# Altium PCB ALTAIR_PD_Sergeant_V26.3b.PcbDoc (part 2 of 4)
Units mm, origin at the board's own origin, x right, y up, seen from the top; angles counter-clockwise.
Board outline 74 x 56 mm, 4 copper layers (Top Layer, Layer 1, Layer 2, Bottom Layer), stack 1.675 mm thick; 215 components, 142 nets, 676 pads, 469 vias.
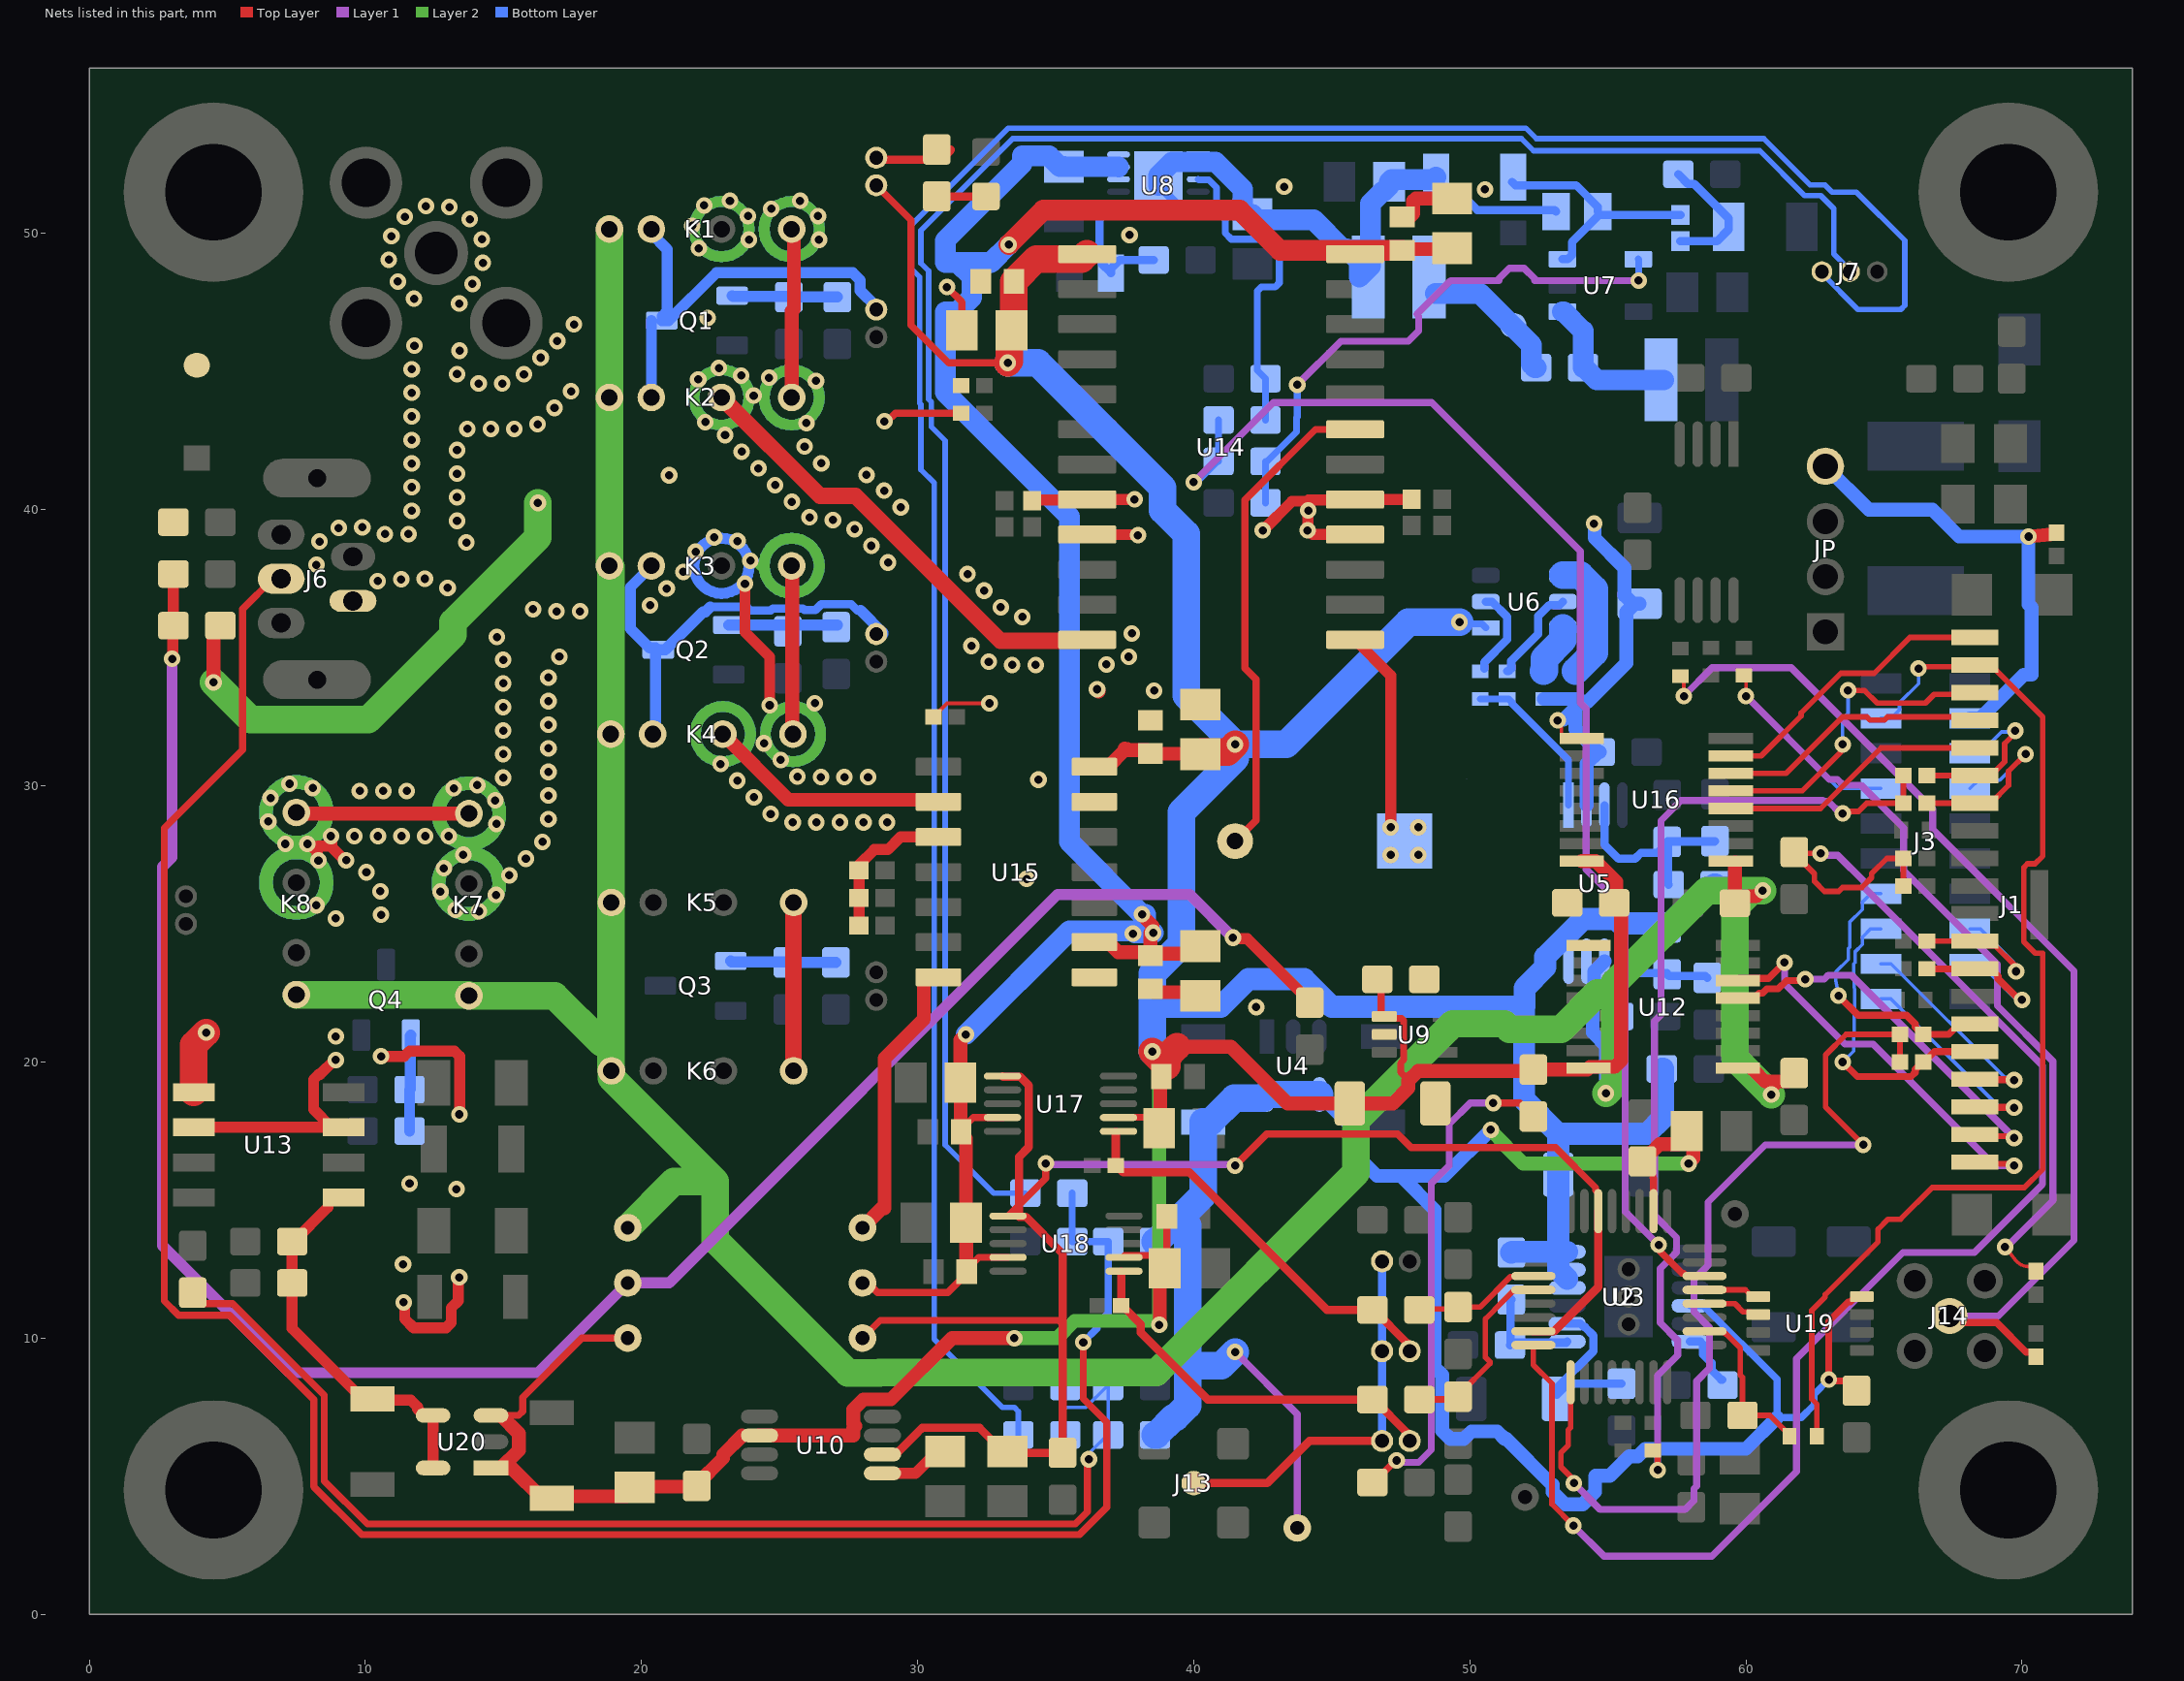
[diagram p4: the nets of this part, all layers, seen from the top]

## Part data
C00 C0: library part CAP, "Murata GRT188R61H105KE13D - Cap Ceramic 1uF 10% 50V X5R 0603 (Placeholder)", MF=Murata, MP=GRT188R61H105KE13D
C1 C2 C3 C4 C12 C23: library part CAP, "Murata GRT319R6YA106KE01D - Cap Ceramic 10uF 35V X5R 10% Pad SMD 1206 85C Automotive T/R", MF=Murata, MP=GRT319R6YA106KE01D
C5 C10 C11 C13 C22 C24 C26 C27 C29 C32 C33 C35 C37 C39 C41 C42 C43 C45 C47 C49 C51 C53 C56 C57 C60: library part CAP, "Kemet C0603C104K5RACAUTO - Cap Ceramic 0.1uF 50V X7R 10% 0603 125C Paper T/R", MF=Kemet, MP=C0603C104K5RACAUTO
C6 C7 C8 C14 C18 C19 C20 C34 C36 C38 C40 C44 C46 C48 C50 C52 C54: library part CAP, "Murata GRM21BR61E106KA73L - Cap Ceramic 10uF 10% 25V X5R 0805", MF=Murata, MP=GRM21BR61E106KA73L
C9 C15 C17 C28: library part CAP, "Murata GRT188R61H105KE13D - Cap MLCC AEC-Q200 X5R 1uF 50V 0603", MF=Murata, MP=GRT188R61H105KE13D
C16: library part CAP, "Kemet C1206C331J5GACTU - Cap Ceramic 330pF 50V 5% NP0 1206", MF=Kemet, MP=C1206C331J5GACTU
C21: library part CAP, "Kemet C0805C475K8PACTU - Cap Ceramic 4.7uF 10V X5R 0805", MF=Kemet, MP=C0805C475K8PACTU
C30: library part CAP, "Wurth Elektronik 885012008037 - Cap Ceramic 10pF 5% 50V NP0 1206", MF="Wurth Elektronik", MP=885012008037
C31: library part CAP, "Kemet C1206C301K5GACTU - Cap Ceramic 300pF 10% 50V NP0 1206", MF=Kemet, MP=C1206C301K5GACTU
C58 C59 C61 C62 C63 C64 C65 C66: library part CAP, "Cap, Nonpolar, Any, Must choose footprint manually"
D1: library part Schottky, "DIODE SCHOTTKY 20V 500MA SOD123", Average Rectified Current=500mA, Case/Package=SOD-123-2, Forward Voltage=385mV, Max Forward Surge Current (Ifsm)=5.5A, Max Operating Temperature=125°C, Max Repetitive Reverse Voltage (Vrrm)=20V, Max Reverse Leakage Current=250uA, Min Operating Temperature=-65°C, Package Quantity=3000, Contact Plating=Tin, Current Rating=500mA, Element Configuration=Single, Forward Current=500mA, Height=1.12mm, Lead Free="Lead Free", Length=2.69mm, Max Reverse Voltage (DC)=20V, Max Surge Current=5.5A, MF=onsemi, MP=MBR0520LT1G, Number of Pins=2, Output Current=500mA, Packaging="Tape and Reel", Peak Non-Repetitive Surge Current=5.5A, Peak Reverse Current=250uA, Polarity=Standard, Radiation Hardening=No, REACH SVHC="No SVHC", Termination=SMD/SMT, Voltage Rating (DC)=20V, Width=1.6mm
D2: library part LED-blue, "LED BLUE CLEAR 0603 SMD", Case Code (Imperial)=0603, Case Code (Metric)=1608, Color=Blue, Forward Current=30mA, Forward Voltage=3.2V, Max Operating Temperature=85°C, Min Operating Temperature=-40°C, Package Quantity=4000, Supplier Part Number 1=732-4966-1-ND, Test Current=20mA, Case/Package=0603, Category=LEDs, ComponentLink1Description=https://datasheet.ciiva.com/29563/150060bs75000-29563034.pdf?src-supplier=Digi-Key, ComponentLink1URL=https://datasheet.ciiva.com/29563/150060bs75000-29563034.pdf?src-supplier=Digi-Key, ComponentLink2Description=https://datasheet.ciiva.com/29279/759426-da-01-en-chipled-0603-w-kl-blau-150060bs75000-29279193.pdf?src-supplier=Conrad, ComponentLink2URL=https://datasheet.ciiva.com/29279/759426-da-01-en-chipled-0603-w-kl-blau-150060bs75000-29279193.pdf?src-supplier=Conrad, ComponentLink3Description=https://datasheet.ciiva.com/29563/150060bs75000-29563035.pdf?src-supplier=Digi-Key, ComponentLink3URL=https://datasheet.ciiva.com/29563/150060bs75000-29563035.pdf?src-supplier=Digi-Key, ComponentLink4Description=https://datasheet.ciiva.com/29563/150060bs75000-29563036.pdf?src-supplier=Digi-Key, ComponentLink4URL=https://datasheet.ciiva.com/29563/150060bs75000-29563036.pdf?src-supplier=Digi-Key, ComponentLink5Description=https://datasheet.ciiva.com/22656/1911343-22656939.pdf?src-supplier=Element14, ComponentLink5URL=https://datasheet.ciiva.com/22656/1911343-22656939.pdf?src-supplier=Element14, ComponentLink6Description=https://datasheet.ciiva.com/48430/150060bs75000-eng-tds-48430039.pdf?src-supplier=Distrelec, ComponentLink6URL=https://datasheet.ciiva.com/48430/150060bs75000-eng-tds-48430039.pdf?src-supplier=Distrelec, Dominant Wavelength=470nm, Height=0.7mm, Length=1.6mm, Lens Style=Clear,Rectangular, Luminous Intensity=145mcd, MF="Wurth Electronics", Mount="Surface Mount", MP=150060BS75000, Packaging="Cut Tape", REACH SVHC=Unknown, RoHS=Yes, Stock 1=66561, Supplier 1=Digi-Key, Viewing Angle=140°, Wavelength=470nm, Width=0.8mm
D3: library part Zener, "DIODE ZENER SOD123", MF=onsemi, MP=MMSZ4679T1G
D4: library part Zener, "Vishay SMAJ12A-M3/61 - TVS Diode 12V Standoff 13.3V Breakdown DO-214AC", MF="Vishay General Semiconductor", MP=SMAJ12A-M3/61
F1: library part Polyfuse, "Bel Fuse 0ZCG0030FF2C - Polymeric PTC Resettable Fuse 30V 300mA hold 600mA trip SMD 1812", MF="Bel Fuse Inc.", MP=0ZCG0030FF2C
H1 H2 H3 H4: "(Plated) Mounting hole"
J1: "20x1 Header SMD", Mouser Part Number=798-DF1920P1V52, Datasheet Link=https://www.hirose.com/en/product/document?clcode=CL0685-0037-0-52&productname=DF19-20P-1V(52)&series=DF19&documenttype=2DDrawing&lang=en&documentid=0001394451, Height=5.37mm, MF=Hirose, Mouser Price/Stock=https://www.mouser.co.uk/ProductDetail/Hirose-Connector/DF19-20P-1V52?qs=QNEnbhJQKvayaXitD7MtBA%3D%3D, MP=DF19-20P-1V(52)
J3: "10x2 Stacking Header SMD /  / 20 Position Receptacle Connector 0.050 (1.27mm) Surface Mount, Right Angle Gold", Package=None, Check_prices=https://www.snapeda.com/parts/CLP-110-02-L-D/Samtec/view-part/?ref=eda, MF=Samtec, MP=CLP-110-02-L-D, SnapEDA_Link=https://www.snapeda.com/parts/CLP-110-02-L-D/Samtec/view-part/?ref=snap, System=Connector
J4: "Coaxial, SMA Female Jack, 50 Ohm, Through-Hole", Mouser Part Number=710-60312002114503, Datasheet Link=https://katalog.we-online.de/em/datasheet/60312002114503.pdf, Height=9.56mm, MF="Wurth Elektronik", Mouser Price/Stock=https://www.mouser.co.uk/ProductDetail/Wurth-Elektronik/60312002114503?qs=3jNSNtuqJTL%2FGpZA1FAOxw%3D%3D, MP=60312002114503
J6: "Conn Mini-USB RCP 5 POS Solder ST Thru-Hole 5 Terminal 1 Port", Color=Black, Flammability Rating="UL94 V-0", Supplier Part Number 1=UE25BE5510H-ND, Category="USB Connectors", ComponentLink1Description=http://components.arrow.com/part/dataview/0323_00956300?src-supplier=Arrow+Europe, ComponentLink1URL=http://components.arrow.com/part/dataview/0323_00956300?src-supplier=Arrow+Europe, ComponentLink2Description=http://www.alliedelec.com/m/d/e7e3d7a920045eebbdef787e60d8b001.pdf?src-supplier=Allied+Electronics, ComponentLink2URL=http://www.alliedelec.com/m/d/e7e3d7a920045eebbdef787e60d8b001.pdf?src-supplier=Allied+Electronics, ComponentLink3Description=https://www.amphenolcanada.com/ProductSearch/drawings/AC/UE25BEX510X.pdf?src-supplier=Digi-Key, ComponentLink3URL=https://www.amphenolcanada.com/ProductSearch/drawings/AC/UE25BEX510X.pdf?src-supplier=Digi-Key, Contact Material="Copper Alloy", Contact Plating=Gold, Features="High Temperature", Gender=Female, Lead Free="Lead Free", MF="Amphenol Commercial", Mount="Through Hole", MP=UE25BE5510H, Number of Contacts=5, Number of Positions=5, RoHS=Yes, Stock 1=6446, Supplier 1=Digi-Key, Termination=PCB
J7: "3x1 Header SMD", Datasheet Link=https://www.mouser.com/datasheet/2/837/BC020-1948594.pdf, Height=3.2mm, MF="GCT (GLOBAL CONNECTOR TECHNOLOGY)", MP=BC020-03-A-0200-0300-L-G
J8: "Mill-Max Individual Insulated Pin 5.99mm Initial Height", MF=Mill-Max, MP=807-22-001-10-006101
J9: "Pad for Pogo Pins with Guard", System=Connector
J10 J11 J12 J15: library part "Jumper 2POS", "Header 2Pos THT 2.54mm Pitch", Operating Temperature="-55°C ~ 125°C", Supplier Part Number 1=SAM1068-01-ND, MF="Samtec Inc.", MP=TSW-101-23-G-D, Supplier 1=Digi-Key
J13: library part MMCX_recp, "Conn MMCX F 50Ohm Solder ST SMD Gold Tray", Case/Package=SMA, Dielectric Material=PTFE, Housing Color=Gold, Manufacturer 1=Molex, Manufacturer Part Number 1=73391-0070, Max Frequency=6GHz, Max Operating Temperature=165°C, Min Operating Temperature=-55°C, Package Quantity=1600, Supplier Part Number 1=WM5560-ND, Voltage Rating=170V, Body Material=Brass, Body Plating=Gold, Category="RF / Coaxial Connectors", ComponentLink1Description=https://datasheet.ciiva.com/30257/448910733910070-rf-coax-nectors-30257114.pdf?src-supplier=Onlinecomponents.com, ComponentLink1URL=https://datasheet.ciiva.com/30257/448910733910070-rf-coax-nectors-30257114.pdf?src-supplier=Onlinecomponents.com, ComponentLink2Description=https://datasheet.ciiva.com/5175/0733910070-rf-coax-connectors-173128-5175036.pdf?src-supplier=Mouser, ComponentLink2URL=https://datasheet.ciiva.com/5175/0733910070-rf-coax-connectors-173128-5175036.pdf?src-supplier=Mouser, ComponentLink3Description=https://datasheet.ciiva.com/15172/getdatasheetpartid-226633-15172901.pdf?src-supplier=Verical, ComponentLink3URL=https://datasheet.ciiva.com/15172/getdatasheetpartid-226633-15172901.pdf?src-supplier=Verical, ComponentLink4Description=https://datasheet.ciiva.com/9419/0733910070-rf-coax-connectors-9419351.pdf?src-supplier=Avnet, ComponentLink4URL=https://datasheet.ciiva.com/9419/0733910070-rf-coax-connectors-9419351.pdf?src-supplier=Avnet, ComponentLink5Description=https://datasheet.ciiva.com/16677/0733910070-rf-coax-connectors-16677276.pdf?src-supplier=Avnet+Europe, ComponentLink5URL=https://datasheet.ciiva.com/16677/0733910070-rf-coax-connectors-16677276.pdf?src-supplier=Avnet+Europe, ComponentLink6Description=https://datasheet.ciiva.com/15237/133380734152061-rf-coax-nectors-15237680.pdf?src-supplier=Arrow+Europe, ComponentLink6URL=https://datasheet.ciiva.com/15237/133380734152061-rf-coax-nectors-15237680.pdf?src-supplier=Arrow+Europe, ComponentLink7Description=https://datasheet.ciiva.com/18494/734152061-sd-18494866.pdf?src-supplier=Digi-Key, ComponentLink7URL=https://datasheet.ciiva.com/18494/734152061-sd-18494866.pdf?src-supplier=Digi-Key, ComponentLink8Description=https://datasheet.ciiva.com/3951/128690734152061-rf-coax-nectors-3951867.pdf?src-supplier=Arrow+Electronics, ComponentLink8URL=https://datasheet.ciiva.com/3951/128690734152061-rf-coax-nectors-3951867.pdf?src-supplier=Arrow+Electronics, Connector Type=PCB,SMA,Coaxial, Contact Material=Copper, Contact Plating=Gold, Depth=6.08mm, Fastening Type=Snap, Gender=Female, Halogen Free="Low Halogen", Impedance=50R, Insulation Material=Teflon, Lead Free="Lead Free", Length=6.08mm, MF=Molex, Mount="Through Hole", MP=0734152061, Orientation=Straight, Packaging=Bulk, Plating=Gold, Pricing 1="1=2.42000, 10=2.19800, 25=2.06320, 50=1.97360, 100=1.88390, 250=1.70448, 500=1.56992, 1000=1.34565, 2500=1.25594 (USD)", Radiation Hardening=No, REACH SVHC=Unknown, RoHS=Yes, Stock 1=31911, Supplier 1=Digi-Key, Termination=Solder
J14: library part CMP-207975-000001-3, "Rf Coaxial, Mmcx Jack, 50 Ohm, Pcb Rohs Compliant: Yes", Dielectric Material=PTFE, Insulation Resistance=1GΩ, Max Operating Temperature=155°C, Min Operating Temperature=-55°C, Voltage Rating=170V, Connector Type=MMCX, Contact Material="Gold, Nickel", Height=4.6mm, Impedance=50Ω, Insertion Loss (dB)=0.25dB, Insulation Material=PTFE, MF="Wurth Elektronik", MP=66012002111503, Number of Contacts=1, RoHS=Compliant
JACF JIVC JLED JTIA: library part BC020-02-A-0200-0300-L-G, "2x1 Header THT 1mm Pitch", Mouser Part Number=640-BC02002A02300LG, Datasheet Link=https://gct.co/connector/bc020, MF="GCT (GLOBAL CONNECTOR TECHNOLOGY)", Mouser Price/Stock=https://www.mouser.co.uk/ProductDetail/GCT/BC020-02-A-0200-0300-L-G?qs=KUoIvG%2F9IlakgsojlT9P9w%3D%3D, MP=BC020-02-A-0200-0300-L-G
JP: "4x1 Header SMD Partial Shroud", Mouser Part Number=571-440054-4, Arrow Part Number=440054-4, Arrow Price/Stock=https://www.arrow.com/en/products/440054-4/te-connectivity?utm_currency=USD&region=europe, Datasheet Link=https://www.te.com/commerce/DocumentDelivery/DDEController?Action=srchrtrv&DocNm=1-1773713-2_HPI_QRG_EN&DocType=Data%20Sheet&DocLang=English&PartCntxt=440054-4&DocFormat=pdf, Height=6.35mm, MF="TE Connectivity", Mouser Price/Stock=https://www.mouser.co.uk/ProductDetail/TE-Connectivity/440054-4?qs=JFPmFzpscO7310iGSDds%2FA%3D%3D, MP=440054-4
K1 K2 K3 K4 K5 K6 K7 K8: library part "RELAY 118-A-5/2D", "High coil resistance SIL/SIP Reed Relay 118-A-5/2D", MF=Pickering, MP=118-1-A-5/2D
L1 L2: library part IND, "TDK VLS3012CX-100M-1 - Inductor 10uH 20% 1.25A 0.324Ohm NonstandardPkg", DC Resistance (DCR)=324mR, Inductance Tolerance=20%, Max DC Current=1.25A, Max Operating Temperature=105°C, Min Operating Temperature=-40°C, Resistor Type=Wirewound, Saturation Current=1A, Test Frequency=100kHz, Core Material=Ferrite, Height=1.20mm, Height - Seated (Max)=0.047inch, Inductance=10uH, Lead Free="Lead Free", Length=3.00mm, MF="TDK Corporation", Mount="Surface Mount", MP=VLS3012CX-100M-1, Number of Pins=2, Packaging="Tape and Reel", Series=VLS-CX-1, Termination=SMD/SMT, Tolerance=20%, Width=3.00mm
Q1 Q2 Q3 Q4: library part "NMOS DMG2302UK", "DIODES INC. Power MOSFET, N Channel, 20 V, 2.8 A, 0.061 ohm, SOT-23, Surface Mount", Supplier Part Number 1=DMG2302UK-7DICT-ND, ComponentLink1Description=http://www.farnell.com/datasheets/2814387.pdf?src-supplier=Farnell, ComponentLink1URL=http://www.farnell.com/datasheets/2814387.pdf?src-supplier=Farnell, ComponentLink2Description=http://www.farnell.com/datasheets/2814387.pdf?src-supplier=Element14, ComponentLink2URL=http://www.farnell.com/datasheets/2814387.pdf?src-supplier=Element14, ComponentLink3Description=https://www.diodes.com/assets/Datasheets/DMG2302UK.pdf?src-supplier=Digi-Key, ComponentLink3URL=https://www.diodes.com/assets/Datasheets/DMG2302UK.pdf?src-supplier=Digi-Key, ComponentLink4Description=http://www.farnell.com/datasheets/2814387.pdf?src-supplier=Newark, ComponentLink4URL=http://www.farnell.com/datasheets/2814387.pdf?src-supplier=Newark, MF=Diodes, MP=DMG2302UK-7, Supplier 1=Digi-Key
R0 R3 R4 R8 R54 R57 R61 R71 R72 R99: library part RES, "Yageo RC0402JR-070RL - Res 0 Ohms 1/16W SMD 0402", MF=YAGEO, MP=RC0402JR-070RL
R1 R17 R21 R22 R66 R67: library part RES, "Vishay CRCW060310K0FKEA SMD 0603 10k, CRCW e3 Series, 75V, thick film, 100mW", MF="Vishay Dale", MP=CRCW060310K0FKEA
R2 R5 R11 R25 R26 R64 R65: library part RES, "Stackpole RMCF0402JT47R0 - Res 47Ohm 5% 0.063W 0402 Thick Film AEC-Q200 compliant", MF="Stackpole Electronics Inc.", MP=RMCF0402JT47R0
R6 R7 R9 R10 R12 R13: library part RES, "Stackpole RMCF0402JT47R0 - Res 47Ohm 5% 0.063W 0402 Thick Film AEC-Q200 compliant (Placeholder)", MF="Stackpole Electronics Inc.", MP=RMCF0402JT47R0
R14 R33 R47 R48 R49 R50: library part RES, "Vishay CRCW06030000Z0EA - Res 0 Ohms 1/8W SMD 0603", MF="Vishay Dale", MP=CRCW06030000Z0EA
R15: library part RES, "Panasonic ERA-3ARB104V - Res SMD 0603 0.1% 0.10W T.C. 10ppm 100K", MF="Panasonic Electronic Components", MP=ERA-3ARB104V
R16: library part RES, "Vishay MCT06030C2003FP500 - Res SMD 200kOhm 1% 1/10W 0603", MF="Vishay Dale", MP=MCT06030C2003FP500
R18: library part RES, "Panasonic ERJ-3EKF6800V - Res SMD 680 Ohm 1% 1/10W 0603", MF="Panasonic Electronic Components", MP=ERJ-3EKF6800V
R19 R20 R36 R38 R39 R42: library part RES, "Vishay CRCW060347R0JNEA - Res 47Ohm 5% 1/8W SMD 0603", MF="Vishay Dale", MP=CRCW060347R0JNEA
R23: library part RES, "Vishay TNPW06032K32BEEA - Res 2.32k 0.1% 0.21W SMD 0603", MF="Vishay Dale", MP=TNPW06032K32BEEA
R24: library part RES, "KOA Speer RN73R1JTTD2231B25 - Res 2.23k 0.1% 1/10W SMD 0603", MF="KOA Speer Electronics, Inc.", MP=RN73R1JTTD2231B25
R27 R28: library part RES, "Yageo RL0402JR-070R1L - Res 0.1Ohm 5% 1/16W SMD 0402", MF=YAGEO, MP=RL0402JR-070R1L
R29: library part RES, "Panasonic ERA-6AEB303V - Res 30kOhm 0.1% 1/8W 0805", MF="Panasonic Electronic Components", MP=ERA-6AEB303V
R30: library part RES, "Yageo RC0402FR-071KL - Res 1kOhm 1% 1/16W 0402", MF=YAGEO, MP=RC0402FR-071KL
R31: library part RES, "Vishay TNPU12061K50BZEN00 - Res 1.5kOhm 0.1% 1/4W 1206", MF="Vishay Dale", MP=TNPU12061K50BZEN00
R32: library part RES, "Panasonic ERA-3AEB114V - Res 110k 0.1% 1/10W SMD 0603", MF="Panasonic Electronic Components", MP=ERA-3AEB114V
R34 R35 R37 R40 R41 R43: library part RES, "Panasonic ERJ-3GEYJ104V - Res 100k 5% 1/10W SMD 0603", MF="Panasonic Electronic Components", MP=ERJ-3GEYJ104V
R44 R51: library part RES
R45: library part RES, "Vishay TNPV12061M00BYEN - Res 1MOhm 0.1% 1/4W SMD 1206", MF="Vishay Dale", MP=TNPV12061M00BYEN
R46: library part RES, "Stackpole RNCF1206TKY10K0 - Res 10k 0.01% 1/4W SMD 1206", MF="Stackpole Electronics Inc.", MP=RNCF1206TKY10K0
R52 R53 R55 R56 R58 R59 R60: library part IMPEDANCE, "Yageo RC0402JR-070RL - Res 0 Ohms 1/16W SMD 0402", MF=YAGEO, MP=RC0402JR-070RL
R62 R63: library part RES, "Panasonic ERA-2AEB5111X - Res 5.11k 0.1% 1/16W SMD 0402", MF="Panasonic Electronic Components", MP=ERA-2AEB5111X
R68 R69 R70: library part RES, "Yageo RC0402FR-0733RL - Res 33Ohm 1% 1/16W 0402", MF=YAGEO, MP=RC0402FR-0733RL
R73 R74 R75 R76: library part RES, "Res, Any, Manually select footprint"
RT1: library part "THERM_RES NTC 0603 10K 1%", "THERMISTOR NTC 10KOHM 3380K 0603", Case Code (Imperial)=0603, Case Code (Metric)=1608, Max Operating Temperature=125°C, Min Operating Temperature=-40°C, Supplier Part Number 1=490-16279-1-ND, Case/Package=0603, Category=Thermistors, ComponentLink1Description=http://www.farnell.com/datasheets/2095755.pdf?src-supplier=Farnell, ComponentLink1URL=http://www.farnell.com/datasheets/2095755.pdf?src-supplier=Farnell, ComponentLink2Description=https://www.murata.com/en-us/products/productdata/8796836233246/L0770E.pdf?src-supplier=Digi-Key, ComponentLink2URL=https://www.murata.com/en-us/products/productdata/8796836233246/L0770E.pdf?src-supplier=Digi-Key, ComponentLink3Description=http://www.farnell.com/datasheets/2095755.pdf?src-supplier=Element14, ComponentLink3URL=http://www.farnell.com/datasheets/2095755.pdf?src-supplier=Element14, MF=Murata, MP=NCU18XH103F60RB, REACH SVHC="No SVHC", RoHS=No, Stock 1=48580, Supplier 1=Digi-Key
U1: "LVCMOS CLOCK BUFFER 3-CHANNEL", MF="Texas Instruments", MP=LMK1C1103PWR
U2: "24BIT ADC Delta-Sigma 4k samples/s PGA V-reference", Case/Package=LQFP, Max Operating Temperature=125°C, Min Operating Temperature=-50°C, Supplier Part Number 1=296-45170-1-ND, Category="Analog to Digital Converters (ADCs)", ComponentLink1Description=http://www.ti.com/general/docs/lit/getliterature.tsp?genericPartNumber=ADS124S08&fileType=pdf&src-supplier=Farnell, ComponentLink1URL=http://www.ti.com/general/docs/lit/getliterature.tsp?genericPartNumber=ADS124S08&fileType=pdf&src-supplier=Farnell, ComponentLink2Description=http://www.ti.com/lit/ds/symlink/ads124s06.pdf?src-supplier=Digi-Key, ComponentLink2URL=http://www.ti.com/lit/ds/symlink/ads124s06.pdf?src-supplier=Digi-Key, Interface=SPI, MF="Texas Instruments", Mount="Surface Mount", MP=ADS124S08IPBSR, Number of A/D Converters=1, Number of Bits=24, Number of Inputs=12, Number of Pins=32, Packaging="Tape and Reel", RoHS=No, Sampling Rate=4000S/s, Stock 1=2523, Supplier 1=Digi-Key
U3: "20V 500mA Ultralow Noise Ultrahigh PSRR Adjustable Linear Regulator 260V Dropout MSOP-12", Case/Package=MSOP, Dropout Voltage=260mV, Max Operating Temperature=125°C, Min Current Limit=570mA, Min Operating Temperature=-40°C, Output Current=500mA, Output Voltage=15V, Supplier Part Number 1=LT3045EMSE#PBF-ND, ComponentLink1Description=http://www.farnell.com/datasheets/2163219.pdf?src-supplier=Farnell, ComponentLink1URL=http://www.farnell.com/datasheets/2163219.pdf?src-supplier=Farnell, ComponentLink2Description=http://www.linear.com/docs/55649?src-supplier=Digi-Key, ComponentLink2URL=http://www.linear.com/docs/55649?src-supplier=Digi-Key, MF="Analog Devices / Linear Technology", MP=LT3045EMSE#PBF, Number of Regulators=1, RoHS=Yes, Stock 1=1588, Supplier 1=Digi-Key
U4 U20: library part ADP7142AUJZ-R7, "1.2-40V 200mA Low Noise CMOS LDO Adjustable Linear Regulator TSOT23", Ambient Temperature Range High=+125°C, Ambient Temperature Range Low=-40°C, Dropout Voltage=200mV, Manufacturer="Analog Devices", Max Junction Temp=+150°C, Max Supply Voltage=40V, Min Supply Voltage=2.7V, Nominal Supply Current=50-180uA, Output Current=200mA, Output Voltage=1.2-5V, Package=UJ-5, Temperature="-40°C to +125°C", Accuracy Percentage=0.8%, Automotive=No, Category=IC, ComponentLink2Description=Datasheet, ComponentLink2URL=https://www.analog.com/media/en/technical-documentation/data-sheets/ADP7142.pdf, Device Class L1="Integrated Circuits (ICs)", Device Class L2="Power Management ICs", Device Class L3="Voltage Regulators - Linear", Digikey Description="IC REG LIN POS ADJ 200MA TSOT23", Height=1mm, Lead Free=Yes, Manufacturer Part Number=ADP7142AUJZ-R7, MF="Analog Devices", Mouser Description="LDO Regulator Pos 1.5V to 5V 0.2A 5-Pin TSOT-23 T/R", MP=ADP7142AUJZ-5.0-R7, Number of Outputs=1, Octopart=https://octopart.com/adp7142aujz-r7-analog+devices-38928114, Output Type=AdjustableProgrammable, RoHS=TRUE, Temperature Range High=+125°C, Temperature Range Low=-40°C
U5: library part OPA2182IDBV, "Op amp, 2 Channel, Highest-precision, 36-V, 5-MHz, single, low-noise, zero-drift, MUX-friendly amplifier 8VSSOP -40 to 125", MF="Texas Instruments", MP=OPA2182IDGKR
U6: "BJT Array, 1NPN 1PNP, VCE(sat) 375mV, hFE 300, Breakdown 30V, 6-SOT-23", MF="Diodes Incorporated", MP=ZXTC2045E6TA
U7: library part LM2611AMF, "1.4MHz Cuk Converter, 5-pin SOT-23, Pb-Free", PackageTopMarking=S40A*XTT, PowerWise=N, ComponentLink1Description="Datasheet URL", ComponentLink1URL=http://www.ti.com/general/docs/lit/getliterature.tsp?genericPartNumber=LM2611&fileType=pdf, CompType=Switcher, MF="Texas Instruments", MP=LM2611AMF/NOPB, PackageDescription="Molded SOT-23, .115 x .063 x .040 in Body, 5 Lead, .0375 in Pitch", PackageReference=DBV0005A, PinCount=5, RoHS=Y
U8: "-20V 500mA Ultralow Noise Ultrahigh PSRR Adjustable Negative Linear Regulator 12DFN", MF="Analog Devices", MP=LT3094EDD#PBF, RoHS Compliant=Yes
U9: "DAC 8bit 1 channel SPI Supply Reference Buffered Voltage", MF="Texas Instruments", MP=DAC5311IDCKR
U10: library part REF5050IDGKR, "2.5V±0.05% Voltage Reference 8VSSOP", Case/Package=VSSOP, Max Input Voltage=18V, Max Operating Temperature=125°C, Max Output Current=10mA, Max Output Voltage=5V, Min Input Voltage=5.2V, Min Operating Temperature=-40°C, Nominal Supply Current=800uA, Operating Supply Current=1.2mA, Package Quantity=1, Supplier Part Number 1=296-27505-1-ND, Temperature Coefficient=3ppm/°C, Tolerance=0.05%, Category="Voltage References", ComponentLink1Description=https://datasheet.ciiva.com/2007/ref5020-2007532.pdf?src-supplier=Digi-Key, ComponentLink1URL=https://datasheet.ciiva.com/2007/ref5020-2007532.pdf?src-supplier=Digi-Key, ComponentLink2Description=https://datasheet.ciiva.com/14197/ref5050-14197084.pdf?src-supplier=Avnet, ComponentLink2URL=https://datasheet.ciiva.com/14197/ref5050-14197084.pdf?src-supplier=Avnet, ComponentLink3Description=https://datasheet.ciiva.com/2007/ref5020-2007533.pdf?src-supplier=Digi-Key, ComponentLink3URL=https://datasheet.ciiva.com/2007/ref5020-2007533.pdf?src-supplier=Digi-Key, ComponentLink4Description=https://datasheet.ciiva.com/2007/ref5020-2007534.pdf?src-supplier=Digi-Key, ComponentLink4URL=https://datasheet.ciiva.com/2007/ref5020-2007534.pdf?src-supplier=Digi-Key, ComponentLink5Description=https://datasheet.ciiva.com/41462/001014471-da-01-en-ic-vref-series-ref5050idgkr-vssop-8-tid-41462326.pdf?src-supplier=Conrad, ComponentLink5URL=https://datasheet.ciiva.com/41462/001014471-da-01-en-ic-vref-series-ref5050idgkr-vssop-8-tid-41462326.pdf?src-supplier=Conrad, Lead Free="Lead Free", MF="Texas Instruments", Min Output Voltage=5V, MP=REF5025IDGKR, Number of Channels=1, Number of Pins=8, Output Current=10mA, Output Type=Fixed, Output Voltage=5V, Packaging="Tape and Reel", Pricing 1="1=6.18000, 10=5.58100, 25=5.32200, 100=4.41320, 250=4.02380, 500=3.76420, 1000=3.45268 (USD)", Quiescent Current=800uA, Radiation Hardening=No, Reference Type=Series, RoHS=Yes, Stock 1=2539, Supplier 1=Digi-Key, Weight=0.00067oz
U12 U16: "Digital Isolator 6-Channel 6/0 Inputs 16SSOP", MF="Texas Instruments", MP=ISO7760DBQR
U13: "Op Amp, 36V, fA input, precision, e-trim", Mouser Part Number=595-OPA928DR, Arrow Part Number=OPA928DR, Arrow Price/Stock=null?region=nac, Datasheet Link=https://www.ti.com/lit/ds/symlink/opa928.pdf?HQS=dis-mous-null-mousermode-dsf-pf-null-wwe&ts=1731036524091&ref_url=https%253A%252F%252Fwww.ti.com%252Fgeneral%252Fdocs%252Fsuppproductinfo.tsp%253FdistId%253D26%2526gotoUrl%253Dhttps%253A%252F%252Fwww.ti.com, Height=1.75mm, MF="Texas Instruments", Mouser Price/Stock=https://www.mouser.co.uk/ProductDetail/Texas-Instruments/OPA928DR?qs=2wMNvWM5ZX5RgAZJHoeYSw%3D%3D, MP=OPA928DR
U14: "Low Noise, Dual Switched Integrator, 14.5 to 36 V, -40 to 125 degC, 24-pin SOIC (DW24), Green (RoHS & no Sb/Br)", Rating=Catalog, Total Supply Voltage(Max)(+5V is 5, +/-5V is 10)=36, Total Supply Voltage(Min)(+5V is 5, +/-5V is 10)=14.5, Code_JEDEC=MS-013, ComponentLink1Description="Manufacturer URL", ComponentLink1URL=http://www.ti.com/, ComponentLink2Description=Datasheet, ComponentLink2URL=http://www.ti.com/lit/ds/symlink/acf2101.pdf, ComponentLink3Description="Package Specification", ComponentLink3URL=http://www.ti.com/litv/pdf/mpds174a, DatasheetVersion=SBFS003, Eco-Plan="Green (RoHS & no Sb/Br)", GBW(Typ)(MHz)=2, Iq per channel(Max)(mA)=15, MF="Texas Instruments", Mounting Technology="Surface Mount", MP=ACF2101BU, Number of Channels=2, Offset Drift(Typ)(uV/C)=1, PackageDescription="24-Pin Plastic Small Outline, Body 15.4 x 7.5 mm, Pitch 1.27 mm", PackageReference=DW0024A, PackageVersion="4040000-5/G, 01/2011", Packing=TUBE, Slew Rate(Typ)(V/us)=3, Sub Family="Precision Amplifier", Vio (25C)(Max)(mV)=2
U15: library part IVC102/SO_5, "Precision Switched Integrator Transimpedance Amplifier", MF="Texas Instruments", MP=IVC102U, Part Reference=U1
U17 U18: library part LT1991IMS#TRPBF, "Programmable Gain Amplifier - Single Channel, Precision, -13 to 14 Gain Selectable Operational Amplifier, 0.56 MHz Typical GBW, 0.12 V/us Typical SR, 2.4 to 40 V, 10-Pin SOP (MS-10), Industial, Pb-Free, Reel", Linear Technology Part Number=LT1991, Channels (#)=1, ComponentLink1Description="Manufacturer URL", ComponentLink1URL=http://www.linear.com/, ComponentLink2Description=Datasheet, ComponentLink2URL=http://cds.linear.com/docs/en/datasheet/1991fh.pdf, ComponentLink3Description="Package Specification", ComponentLink3URL=http://cds.linear.com/docs/en/packaging/MSOP_10_05-08-1661.pdf, DatasheetVersion="Rev. H", GBW (MHz) Typical=0.56, Is (mA) Typical=0.1, MF="Linear Technology", Mounting Technology="Surface Mount", MP=LT1991AIMS#PBF, PackageDescription="10-Lead Plastic MSOP, Body 3 x 3 mm, Pitch 0.5 mm", PackageReference=LT-MS-10, PackageVersion="Rev E", Packing=Reel, RevisionNote="URLs updated", RoHS=Pb-Free, SR (V/us) Typical=0.12, Type=SGA, Vos (mV) Guaranteed=0.05, Vos (mV) Typical=0.015, Vs Max (V)=40, Vs Min (V)=2.4
U19: library part CMP-0859-00546-3, "2-Line-to-4-Line Decoder, DCT0008A, SMALL T&R", F @ Nom Voltage(Max)(Mhz)=150, Generic Part Number=SN74LVC1G139, ICC @ Nom Voltage(Max)(mA)=0.01, Manufacturer="Texas Instruments", Operating Temperature Range(C)="-40 to 85", Rating=Catalog, tpd @ Nom Voltage(Max)(ns)=16.5,7.5,4.9,3.6, Voltage(Nom)(V)=1.8,2.5,3.3,5, 3-State Output=No, Bits(#)=1, DatasheetVersion=SCES602C, Input Type=CMOS/TTL, Logic=True, Output Drive (IOL/IOH)(Max)(mA)=32/-32, Output Type=CMOS, PackageReference=DCT0008A, Schmitt Trigger=No, Specialty Logic Family=Decoder/Encoder/Multiplexer, Sub-Family=Decoder/Encoder/Multiplexer, Technology Family=LVC, VCC(Max)(V)=5.5, VCC(Min)(V)=1.65
Y1: "MEMS OSC XO 4.096MHZ H/LVCMOS", Case/Package=SMD/SMT, Max Supply Current=4.5mA, Height=0.032inch, MF=SiTime, Mount="Surface Mount", MP=SiT1602BC-21-XXN-4.096000, RoHS Compliant=Yes, Series=SIT1602, Width=0.098inch

## Via types
v1: diameter 0.6, hole 0.3, Top Layer to Bottom Layer, 303 vias
v2: diameter 0.8, hole 0.5, Top Layer to Bottom Layer, 122 vias
v3: diameter 0.6, hole 0.3, Top Layer to Bottom Layer, tented both sides, 44 vias

## Nets (pads, with @x,y where several pads share a name; then routed paths per layer and width w, separated by ;. In a path a pad name is that pad's centre, name@x,y a point inside that pad or via, vN(x,y) a via of type N, cw(c..) or ccw(c..) an arc to the next point about the centre after c; other vN are vias at no path point)
4V9: C0.1 C00.1 C12.2 C13.2 C22.1 C23.1 C27.1 C33.1 C34.1 C35.1 C36.1 C37.1 C38.1 C39.1 C40.1 C42.1 D3.2 R27.1 R28.1 R52.1 R54.2 R55.1 R57.2 R61.2 R76.1 TP5.1 U5.2 U9.5 U12.9 U13.1 U14.4 U14.5 U14.20 U14.21 U15.7 U15.8 U15.13 U16.9 | length 90.8
  Top Layer w0.127: R61.2@30.575,32.5 31.066,32.991 v1(32.603,32.991) ; v1(53.18,32.374) 53.18,32.246 53.314,32.113 53.314,31.864 53.455,31.722 U16.9@54.05,31.722
  Top Layer w0.254: v1(28.8,43.2) 28.894,43.2 29.194,43.5 R57.2@31.575,43.5 ; v1(31.066,48.063) 31.6,47.529 C36.1@31.6,46.5 ; R76.1@46.471,4.779 46.521,4.779 47.313,5.571 v1(47.346,5.571) ; v1(50.843,18.517) 51.809,18.517 C27.1@52.301,18.025
  Top Layer w0.4: R55.1@34.154,40.325 34.177,40.347 36.121,40.347 36.146,40.372 37.855,40.372 v3(37.858,40.375) ; U14.21@36.143,39.1 37.933,39.1 v3@37.95,39.117 ; v1(42.5,39.25) 43.562,40.312 44.112,40.312 44.15,40.35 44.16,40.36 45.833,40.36 45.846,40.372 47.898,40.372 R52.1@47.9,40.375 ; v3(44.125,39.25) v3@44.137,39.25 ; v3(44.15,39.972) 44.137,39.959 v3@44.137,39.25 ; U14.4@45.843,39.1 45.831,39.112 44.317,39.112 44.179,39.25 v3@44.137,39.25
  Top Layer w0.5: v1(4.5,33.75) 4.5,35.554 C00.1@4.747,35.801 ; TP5.1@28,14 28.709,14.709 28.798,14.709 28.798,20.131 30.224,21.557 30.224,22.996 30.299,23.071 U15.7@30.75,23.071 ; v3(36.5,33.5) 36.5,33.473 v3@36.55,33.423 ; C39.1@38.432,22.65 38.557,22.525 40.115,22.525 C40.1@40.24,22.4 ; C33.1@47.748,50.6 47.823,50.6 47.948,50.725 47.948,51.182 48.041,51.275 C34.1@49.355,51.275
  Top Layer w1: U13.1@3.788,18.905 3.788,20.62 v1(4.237,21.069)
  Layer 1 w0.254: v1(47.346,5.571) 47.44,5.571 47.513,5.498 48.144,5.498 48.602,5.956 48.602,15.602 49.25,16.25 49.25,17.75 50.017,18.517 v1(50.843,18.517)
  Layer 2 w1: v1(4.5,33.75) 5.854,32.396 10.102,32.396 13.176,35.47 13.176,35.926 16.25,39 v1(16.25,40.25)
  Bottom Layer w0.5: R27.1@52.675,33.15 R28.1@53.825,33.15 ; v1(53.18,32.374) 53.199,32.394 53.39,32.394 53.825,32.829 ; U5.2@54.225,29.3 54.225,30.8 C13.2@54.65,31.225 ; v1(54.5,39.5) 54.519,39.481 54.519,38.981 55.6,37.9 55.6,36.9 55.9,36.6 C12.2@55.906,36.6 ; C13.2@54.7,31.225 C13.2@54.65,31.225 ; C12.2@56.15,36.6 55.97,36.6 55.67,36.3 55.67,34.445 54.276,33.051 54.048,33.051 53.825,32.829 ; 53.825,32.829 53.825,32.05 C13.2@54.65,31.225
  other v1: 42.262,21.988 21,41.25
  other v3: 33.947,26.634 34.375,30.225 38.568,33.45 37.976,39.076 37.675,49.95 50.55,51.6 43.275,51.7
5VTIA: C28.2 C29.2 C65.1 U13.5 U20.4 U20.5 | length 14.2
  Top Layer w0.4: C29.2@7.35,13.5 7.4,13.5 8.65,14.749 8.65,14.97 8.68,15 U13.5@9.25,15 ; C29.2@7.5,13.5 7.35,13.35 C28.2@7.35,12 7.35,10.35 9.9,7.8 C65.1@10.25,7.8 ; C65.1@10.25,7.75 11.65,7.75 11.884,7.516 11.884,7.44 12.124,7.2 U20.4@12.25,7.2 ; U20.4@12.25,7.25 12.339,7.25 12.45,7.139 U20.5@12.45,5.3
10V: C4.2 C5.1 C6.2 C9.2 C22.2 C23.2 C27.2 C35.2 C36.2 C37.2 C38.2 C42.2 C43.2 C44.2 C47.2 C48.2 C66.1 JLED.1 R16.2 R21.2 R23.2 TP3.1 U3.10 U3.11 U3.12 U5.8 U6.1 U9.4 U10.2 U12.16 U14.13 U15.14 U16.16 U17.7 U18.7 U20.1 U20.3 | length 191.9
  Top Layer w0.254: U20.3@14.55,7.2 15.547,7.2 15.696,7.349 15.696,7.855 17.841,10 TP3.1@19.5,10 ; JLED.1@28.5,51.75 29.762,50.488 29.762,46.679 31.118,45.323 v1(33.263,45.323) ; U17.7@37.25,18 38.35,18 C44.2@38.75,17.6 ; U18.7@37.5,13 38.502,13 C48.2@38.95,12.552 ; C48.2@39,12.75 39.025,12.775 C47.2@39.025,14.41 ; C22.2@46.65,23 46.787,22.862 46.787,21.723 46.933,21.577 47.528,21.577 47.604,21.501 47.604,20.074 47.5,19.97 47.5,19.622 47.77,19.352
  Top Layer w0.5: U20.3@14.55,7.2 14.903,7.2 15.554,6.548 15.554,5.943 14.911,5.3 U20.1@14.55,5.3 14.566,5.284 15.316,5.284 16.4,4.2 C66.1@16.75,4.2 16.825,4.275 19.425,4.275 C6.2@19.75,4.6 19.775,4.625 21.975,4.625 C5.1@22,4.65 22,4.7 22.957,5.657 22.957,5.782 23.653,6.478 U10.2@23.643,6.478 ; U10.2@24.275,6.478 27.673,6.478 27.673,6.738 27.753,6.818 27.673,6.898 27.673,7.418 28.04,7.785 29.035,7.785 31.25,10 v1(33.5,10) ; U15.14@36.9,30.691 37.478,31.269 37.478,31.301 37.5,31.323 37.5,31.35 37.519,31.331 37.594,31.331 37.625,31.3 38.307,31.3 C37.2@38.432,31.175 38.445,31.163 C38.2@40.053,31.163 ; v1(38.75,10.48) 38.769,10.499 38.769,12.371 C48.2@38.95,12.552 ; C44.2@38.75,17.75 38.787,17.788 C43.2@38.787,19.437 ; C47.2@38.9,14.535 C47.2@39.025,14.41 ; 39.39,20.552 41.344,20.552 43.396,18.5 C23.2@45.65,18.5 47.212,18.5 47.77,19.058 47.77,19.323 48.124,19.677 51.98,19.677 C27.2@51.982,19.675 ; C27.2@52.268,19.733 54.255,19.733 54.345,19.822 55.248,19.822 55.477,20.051 55.477,25.371 55.3,25.548 55.3,26.533 54.555,27.277 U16.16@54.05,27.277
  Top Layer w1: v1(33.263,45.323) 33.325,45.384 33.325,46.425 C36.2@33.4,46.5 33.475,46.575 33.475,48.261 C35.2@33.489,48.275 34.299,49.085 35.943,49.085 U14.13@36.126,49.267 ; v1(38.5,20.377) 39.023,19.854 39.023,20.185 39.39,20.552 ; C38.2@40.24,31.15 40.315,31.225 41.225,31.225 v1(41.5,31.5)
  Layer 2 w0.5: v1(33.5,10) 35.058,10 35.681,10.623 38.58,10.623 38.723,10.48 v1(38.75,10.48) 38.75,20.1 38.5,20.35 v1(38.5,20.377)
  Bottom Layer w0.254: v1(49.623,35.932) 49.689,35.866 50.434,35.866 U6.1@50.575,35.725
  Bottom Layer w0.8: 38.5,22 40.973,22 41.973,23 44,23 45,22 51.962,22 ; R16.2@51.5,13.1 51.525,13.125 U3.12@53.2,13.125 ; 53.525,12.15 53.2,12.475 U3.12@53.2,13.125 ; U3.12@53.525,13.125 U3.12@53.2,13.125 ; C9.2@56.95,19.75 57,19.75 57,17.987 56.414,17.401 53.2,17.401 ; R23.2@58.9,26.425 58.85,26.425 58.75,26.325 58.75,26.253 57.895,25.398 57.623,25.398 57.25,25.025 55.45,25.025 55.293,25.182 54.106,25.182 52.731,23.807 52.731,23.43 51.978,22.677 51.978,22.016 51.962,22 ; 51.962,22 51.962,18.638 53.2,17.401 ; U3.12@53.2,13.125 C4.2@53.2,15.925 53.2,17.401
  Bottom Layer w1: v1(33.263,45.323) 34.352,45.323 38.878,40.797 38.878,39.978 39.723,39.132 39.723,33.277 v1(41.5,31.5) ; v1(38.5,20.377) 38.5,22 38.5,23.203 39.551,24.255 39.551,29.051 41.5,31 v1(41.5,31.5) ; v1(49.623,35.932) 47.777,35.932 43.345,31.5 v1(41.5,31.5)
-11V: C20.1 C33.2 C34.2 C39.2 C40.2 C45.2 C46.2 C49.2 C50.2 TP1.1 U8.10 U8.11 U8.12 U14.12 U15.9 U17.4 U18.4 | length 86.9
  Top Layer w0.254: TP1.1@28,12 28.202,12 28.546,11.656 31.096,11.656 31.775,12.335 C49.2@31.775,12.41 ; C45.2@31.525,17.5 32.015,17.99 U17.4@33.075,17.99 ; C49.2@31.725,12.435 32.215,12.925 U18.4@33.275,12.925
  Top Layer w0.5: C45.2@31.525,17.5 31.525,17.45 31.75,17.225 C50.2@31.75,14.185 ; C45.2@31.562,17.562 31.562,19.238 C46.2@31.55,19.25 31.55,20.8 v1(31.75,21) ; C49.2@31.762,12.498 C50.2@31.762,14.173 ; U15.9@36.4,24.341 36.9,24.341 37.266,23.975 38.307,23.975 C39.2@38.432,23.85 v3@38.432,24.677 ; v3(38.125,25.35) 38.125,25.323 38.512,24.936 38.512,24.697 v3(38.531,24.677) ; C39.2@38.475,23.85 38.55,23.925 40.164,23.925 C40.2@40.24,24.001 ; C33.2@47.55,49.4 47.587,49.438 49.318,49.438 C34.2@49.355,49.475
  Top Layer w0.75: v1(33.3,49.6) 34.545,50.845 41.667,50.845 43.112,49.4 C33.2@47.55,49.4
  Bottom Layer w0.75: v1(31.75,21) 35.5,24.75 37.8,24.75 37.873,24.677 v3(38.531,24.677) ; v1(33.3,49.6) 32.658,48.958 31.436,48.958 ; U8.11@37.278,52.417 37.274,52.421 35.304,52.421 C20.1@35.3,52.425 35.15,52.425 34.762,52.813 33.787,52.813 33.787,52.537 31,49.75 31,48.958 31.436,48.958 ; v3(38.125,25.35) 35.5,27.975 35.5,39.75 31,44.25 31,47.168 31.436,47.168 31.961,47.693 31.961,48.434 31.436,48.958 ; v3@38.25,24.75 v3@38.25,25.35
  other v3: 37.8,24.65
-11V_EN: R19.1 R34.1 U8.3 | length 11.8
  Bottom Layer w0.254: U8.3@40.16,51.967 40.175,51.951 40.546,51.951 40.829,51.668 40.829,51.171 41.146,50.854 41.146,50.02 41.366,49.8 42.884,49.8 43.104,49.58 43.104,48.22 42.955,48.071 42.451,48.071 42.302,47.922 42.302,45.048 R34.1@42.6,44.75 R19.1@42.6,43.25
-16V: C16.1 C18.1 C19.1 L2.2 R29.2 U8.1 U8.2 U8.5 U8.13 | length 22.7
  Bottom Layer w0.3: U8.13@38.719,51.742 39.394,51.067 U8.5@40.16,51.067 ; C16.1@48.775,52.05 48.775,51.926 49.1,51.601 49.524,51.601 50.268,50.857 53.068,50.857 R29.2@53.125,50.8
  Bottom Layer w0.75: U8.13@38.719,51.742 38.719,52.096 39.219,52.596 40.791,52.596 41.775,51.612 41.775,50.9 41.975,50.7 C19.1@42.125,50.7 42.325,50.5 44.345,50.5 45.392,49.453 45.547,49.453 45.999,49.001 45.999,48.425 46.4,48.826 46.4,51.086 46.839,51.525 46.875,51.525 47.075,51.725 C18.1@47.075,51.875 47.163,51.962 48.687,51.962 C16.1@48.775,52.05
-16V_EN: R20.1 R35.1 U7.4 | length 20.4
  Layer 1 w0.254: v1(43.75,44.528) 45.325,46.103 47.232,46.103 47.768,46.103 48.147,46.482 48.147,47.018 48.082,47.082 49.301,48.301 51.053,48.301 51.053,48.368 51.432,48.747 51.968,48.747 52.347,48.368 52.347,48.301 v1(56.115,48.301)
  Bottom Layer w0.254: R35.1@42.6,40.25 R20.1@42.6,41.75 42.65,41.75 43.719,42.819 43.719,43.339 43.75,43.37 v1(43.75,44.528) ; U7.4@56.1,49.075 56.115,49.06 v1(56.115,48.301)
\DRDY1: J1.6 J3.06 R3.1 | length 6.3
  Top Layer w0.2: R3.1@66.55,30.375 68.866,30.375 69.368,30.877 69.368,31.533 69.75,31.915 v1(69.75,32)
  Bottom Layer w0.127: J3.06@68.113,31.175 68.481,31.175 69.26,31.953 69.703,31.953 v1(69.75,32)
\DRDY2: J1.7 J3.08 R4.1 | length 7.1
  Top Layer w0.2: R4.1@66.55,29.375 68.866,29.375 69.51,30.019 69.51,30.53 v1(70.13,31.15)
  Bottom Layer w0.127: J3.08@68.113,29.905 68.418,30.21 69.19,30.21 v1(70.13,31.15)
\SPI_CS1: J1.15 J3.13 R12.1 | length 10.3
  Top Layer w0.254: v1(63.35,22.401) 64.055,21.696 65.813,21.696 66.129,21.38 66.129,21.271 66.4,21 67.341,21 67.716,21.375 J1.15@68.291,21.375
  Bottom Layer w0.127: v1(63.35,22.401) 63.25,22.955 63.25,23.262 63.706,23.718 63.706,24.107 63.754,24.155 63.754,25.066 64.214,25.526 64.214,25.79 64.519,26.095 J3.13@64.887,26.095
\SPI_CS2: J1.16 J3.15 R13.1 | length 11.1
  Top Layer w0.254: v1(63.5,20) 64.029,19.471 65.98,19.471 66.129,19.62 66.129,19.729 66.4,20 66.45,20 66.825,20.375 J1.16@68.291,20.375
  Bottom Layer w0.127: v1(63.5,20) 63.865,20.365 63.902,20.402 63.933,22.392 ccw(c63.35,22.401) 63.933,22.418 63.902,23.45 63.902,23.555 63.939,23.593 63.96,23.613 63.96,24.002 64.214,24.256 64.214,24.52 64.519,24.825 J3.15@64.887,24.825
\SPI_CS3: J1.12 J3.16 R9.1 | length 6.2
  Top Layer w0.2: R9.1@66.55,24.375 J1.12@68.291,24.375 68.466,24.2 69.041,24.2 69.706,23.535 69.706,23.359 v1(69.783,23.283)
  Bottom Layer w0.127: J3.16@68.113,24.825 68.481,24.825 69.692,23.614 69.692,23.373 v1(69.783,23.283)
\SPI_CS4: J1.13 J3.18 R10.1 | length 6.4
  Top Layer w0.254: R10.1@66.55,23.375 68.866,23.375 69.136,23.105 69.136,23.015 69.834,22.316 69.934,22.316 v1(70,22.25)
  Bottom Layer w0.127: J3.18@68.113,23.555 68.481,23.555 69.696,22.341 69.909,22.341 v1(70,22.25)
\SYS_RESET: J1.2 J3.03 R2.1 | length 40.6
  Top Layer w0.2: R2.1@62.571,6.446 62.571,7.606 62.38,7.797 62.38,11.003 62.87,11.493 62.87,11.579 64.782,13.492 64.782,13.946 65.146,14.309 65.6,14.309 66.743,15.452 70.079,15.452 70.75,16.123 70.75,23.938 70.482,23.938 70.064,24.356 70.064,27.044 70.197,27.177 70.465,27.177 70.75,27.462 70.75,32.491 68.929,34.312 66.312,34.312 v1(66.25,34.25)
  Bottom Layer w0.127: J3.03@64.887,32.445 65.255,32.445 65.56,32.75 65.56,33.014 66.25,33.704 v1(66.25,34.25)
A2V5: C8.2 C24.1 TP2.1 U2.7 U2.30 U10.6 U17.1 U18.1 | length 60.6
  Top Layer w0.254: TP2.1@28,10 28.647,10.647 35.103,10.647 35.25,10.5 ; U18.1@33.275,14.425 33.675,14.825 34.642,15.792 v1(34.642,16.33) ; v1(41.5,16.25) 42.645,17.395 47.381,17.395 47.874,16.902 53.108,16.902 54.554,15.456 54.554,15.358 54.65,15.262 U2.30@54.65,14.6
  Top Layer w0.3: U10.6@28.725,5.788 28.763,5.826 29.244,5.826 29.998,6.581 29.998,6.59 30.16,6.752 32.248,6.752 33.1,5.9 C8.2@33.25,5.9 33.3,5.85 C24.1@35.25,5.85 35.25,10.5 35.25,13.069 33.919,14.4 U18.1@33.675,14.4 ; U17.1@33.075,19.49 33.1,19.465 33.719,19.465 34.027,19.157 34.027,16.917 33.675,16.565 33.675,14.825 33.675,14.45 U18.1@33.65,14.425 ; U2.7@52.3,10.25 53.054,10.25 54.65,11.846 U2.30@54.65,14.6
  Layer 1 w0.254: v1(34.642,16.33) 34.681,16.29 41.46,16.29 v1(41.5,16.25)
A5VSW: C26.2 C41.2 K1.1 K2.1 K3.1 K4.1 K5.1 K6.1 K7.1 K8.1 TP6.1 U5.6 U5.7 U12.1 U16.1 | length 125
  Top Layer w0.5: U16.1@59.6,27.233 C41.2@59.6,25.75 59.85,26 60.37,26 60.579,26.209 v1(60.606,26.209) ; U12.1@60.25,19.733 60.683,19.3 61.147,19.3 ; v1(60.917,18.823) 60.936,18.843 60.936,19.089 61.147,19.3 ; C26.2@61.75,19.6 61.75,19.55 61.5,19.3 61.147,19.3
  Layer 2 w1: K8.1@7.5,22.44 13.71,22.44 K7.1@13.75,22.4 16.85,22.4 18.561,20.689 18.885,20.689 ; K1.1@18.838,50.163 18.838,44.067 18.838,37.971 18.885,37.923 K4.1@18.885,31.874 18.885,25.802 K5.1@18.909,25.778 18.885,25.754 18.885,20.689 ; TP6.1@19.5,14 21.169,15.669 22.669,15.669 ; v1(54.928,18.87) 55.254,19.196 55.254,22.5 ; 60.206,26.209 59.609,25.612 59.609,20.132 v1(60.917,18.823) ; v1(60.606,26.209) 58.577,26.209 55.254,22.886 55.254,22.5 ; 18.885,20.689 18.885,19.706 K6.1@18.909,19.682 18.909,19.429 22.669,15.669 ; 22.669,15.669 22.669,13.558 27.481,8.746 28.613,8.746 28.617,8.75 38.636,8.75 45.873,15.987 45.873,17.873 49.387,21.387 51.246,21.387 51.446,21.187 53.305,21.187 54.618,22.5 55.254,22.5
  Bottom Layer w0.5: U5.6@54.875,23.65 54.5,23.275 54.5,22.285 54.448,22.233 54.448,21.067 54.928,20.587 v1(54.928,18.87)
ACF_ADCIN: C62.2 R74.2 U2.3 | length 4.7
  Top Layer w0.2: R74.2@48.171,11.029 48.196,11.054 49.346,11.054 C62.2@49.571,11.279 ; C62.2@49.571,11.129 50.371,11.129 51.473,12.231 52.272,12.231 U2.3@52.321,12.279
ACF_HOLD: J1.4 U16.6 | length 9.8
  Top Layer w0.2: U16.6@59.45,30.452 61.452,30.452 63.5,32.5 64.373,32.5 64.493,32.38 65.007,32.38 65.127,32.5 68.166,32.5 J1.4@68.291,32.375
ACF_LVLAMP_OUT: JACF.1 R62.2 R74.1 U17.6 | length 14.7
  Top Layer w0.3: U17.6@37.175,17.465 R62.2@37.175,16.25 37.2,16.25 37.45,16 39.852,16 44.823,11.029 R74.1@46.471,11.029 ; R74.1@46.521,11.029 47.725,9.825 47.725,9.625 JACF.1@47.821,9.529
ACF_RELAY_GND: J10.2 K1.2 K2.2 Q1.3 | length 15.6
  Bottom Layer w0.4: K2.2@20.358,44.067 Q1.3@20.358,46.858 ; K1.2@20.358,50.163 20.358,50.001 20.929,49.43 20.929,47.179 Q1.3@20.75,47 ; Q1.3@20.734,46.853 20.984,46.853 22.711,48.58 27.654,48.58 27.919,48.315 27.919,47.939 28.5,47.358 J10.2@28.5,47.25
ACF_RESET: J1.3 U16.5 | length 11.9
  Top Layer w0.2: U16.5@59.45,29.817 62.035,29.817 63.423,31.206 63.423,31.423 v1(63.5,31.5) ; v1(63.698,33.462) 63.708,33.452 64.298,33.452 64.75,33 66.5,33 66.813,33.312 68.228,33.312 J1.3@68.291,33.375
  Bottom Layer w0.127: v1(63.5,31.5) 63.5,32.427 63.698,32.625 v1(63.698,33.462)
ACF_SELA: J1.1 U16.7 | length 10.7
  Top Layer w0.2: U16.7@59.45,31.087 60.55,31.087 61.996,32.533 61.996,32.636 63.441,34.082 64.643,34.082 65.937,35.375 J1.1@68.291,35.375
ACF_SELB: J1.5 U16.4 | length 9.7
  Top Layer w0.2: U16.4@59.45,29.182 62.697,29.182 64.889,31.375 J1.5@68.291,31.375
ACF_SOLDIER_RETURN: J8.1 U14.7 | length 17.9
  Top Layer w0.254: J8.1@41.5,28 42.254,28.754 42.254,33.864 41.853,34.265 41.853,40.353 44.41,42.91 U14.7@45.843,42.91
ACF_SWA_IN: K2.3 U14.24 | length 16.5
  Top Layer w0.6: K2.3@22.898,44.067 26.465,40.5 27.75,40.5 33,35.25 U14.24@35.75,35.25
ADC_CLK: J3.07 R68.1 R71.2 | length 34.4
  Top Layer w0.127: R68.1@59.925,34 60,33.925 v1(60,33.25) ; v1(69.386,13.305) 69.772,12.816 ccw(c70.23,13.177) 70.23,12.594 70.289,12.594 R71.2@70.5,12.425
  Layer 1 w0.254: v1(60,33.25) 63.016,30.234 63.312,30.234 63.518,30.028 64.16,30.028 65.709,28.48 65.709,26.932 69.103,23.537 69.103,22.039 71.119,20.023 71.119,14.981 69.443,13.305 v1(69.386,13.305)
  Bottom Layer w0.127: v1(60,33.25) 63.345,29.905 J3.07@64.887,29.905
AVDD: C51.2 C52.2 C58.1 C60.2 R44.2 R51.2 TP4.1 U2.26 U3.4 U4.4 U4.5 U19.8 | length 87.4
  Top Layer w0.254: C51.2@56.25,16.4 56.623,16.027 56.623,15.808 56.65,15.781 U2.26@56.65,14.6 ; C60.2@64,8 64,8.076 63.627,8.449 63.051,8.449 v1(63,8.5) 63,10.613 63.695,11.308 63.775,11.308 63.971,11.504 U19.8@64.196,11.504
  Top Layer w0.5: C51.2@56.25,16.4 56.25,16.45 56.5,16.7 56.55,16.7 56.875,17.025 57.525,17.025 57.85,17.35 C52.2@57.85,17.5 58.089,17.261 58.089,16.504 58.084,16.504 57.914,16.333 v1(57.924,16.323)
  Layer 1 w0.254: v1(41.5,9.5) 43.749,7.251 TP4.1@43.749,3.129
  Layer 2 w0.5: v1(50.758,17.549) 50.758,17.522 51.295,16.984 51.295,16.955 51.927,16.323 v1(57.924,16.323)
  Bottom Layer w0.254: U3.4@57.975,11.175 58.463,11.175 61.125,8.513 61.125,7.125 62.001,7.125 62.467,7.591 62.467,7.967 v1(63,8.5)
  Bottom Layer w0.5: U4.4@44.55,18.825 45.673,17.702 45.673,16.835 46.637,15.871 47.504,15.871 ; v1(50.758,17.549) 49.08,15.871 47.504,15.871 ; 61.125,7.125 59.997,5.997 56.357,5.997 56.083,5.723 55.776,5.723 55.069,5.016 54.557,5.016 54.538,4.997 54.538,4.431 54.087,3.98 53.449,3.98 52.998,4.431 52.998,4.697 52.973,4.697 51.321,6.349 51.263,6.349 50.989,6.623 50.057,6.623 49.784,6.349 49.293,6.349 49,6.642 49,8.67 48.725,8.945 48.725,14.65 47.504,15.871
  Bottom Layer w1: R51.2@38.6,6.5 38.65,6.5 39.273,7.123 39.336,7.123 39.777,7.564 39.777,9 ; R44.2@38.6,13.5 38.65,13.5 39.5,14.35 ; C58.1@40.35,17.825 40.35,15.2 39.5,14.35 ; C58.1@40.6,17.825 41.473,18.698 42.523,18.698 U4.5@42.65,18.825 U4.4@44.55,18.825 ; v1(41.5,9.5) 41,9 39.777,9 ; 39.5,14.35 39.777,14.073 39.777,9
DIG_GND: J3.04 JP.4 R99.2 | length 17.4
  Top Layer w0.5: v1(70.23,39.029) 71.225,39.125 R99.2@71.25,39.175
  Bottom Layer w0.5: JP.4@62.875,41.575 64.45,40 66.75,40 67.721,39.029 v1(70.23,39.029) 70.23,36.572 70.343,36.459 70.343,34.029 70.066,34.029 68.481,32.445 J3.04@68.113,32.445
GPIO_DECODERA: U2.21 U19.1 | length 1.9
  Top Layer w0.2: U2.21@58.5,11.75 59.975,11.75 60.196,11.529 U19.1@60.321,11.529
GPIO_DECODERB: U2.20 U19.2 | length 2
  Top Layer w0.2: U2.20@58.5,11.25 59.6,11.25 59.896,10.954 60.146,10.954 U19.2@60.321,10.779
GUARD: J6.4 U13.2 U13.7 | length 176.2
  Top Layer w0.4: U13.2@3.788,17.635 U13.7@9.212,17.635 8.775,17.635 8.123,18.287 8.123,19.365 8.314,19.557 8.358,19.557 8.876,20.075 v1(8.93,20.075) ; v1(7.9,27.9) 7.938,27.862 8.085,27.862 8.126,27.821 8.126,27.738 8.262,27.602 8.262,27.338 v1(8.3,27.3) ; 8.3,27.821 8.739,27.821 9.25,27.309 v1(9.305,27.309) ; v1(8.749,28.18) 8.788,28.142 8.788,27.88 ; v1(10.57,20.206) 11.406,20.206 11.602,20.402 13.218,20.402 13.41,20.21 13.41,18.112 v1(13.403,18.105) ; v1(11.387,11.296) 11.425,11.257 11.425,10.695 11.747,10.373 12.918,10.373 13.11,10.565 13.11,11.1 13.362,11.352 13.362,12.162 v1(13.4,12.2) ; v1(23.747,37.324) 23.747,35.569 24.642,34.674 v1(24.642,32.919)
  Layer 2 w0.254: v1(23.947,38.154) 24.041,38.154 24.292,37.903 24.44,37.903
  Layer 2 w0.4: v1@23.898,44.067 ccw(c22.898,44.067) v1@23.898,44.067 ; 23.898,50.163 ccw(c22.898,50.163) 23.898,50.163 ; 23.945,31.874 ccw(c22.945,31.874) 23.945,31.874 ; 26.438,37.971 ccw(c25.438,37.971) 26.438,37.971 ; 26.438,44.067 ccw(c25.438,44.067) 26.438,44.067 ; 26.438,50.163 ccw(c25.438,50.163) 26.438,50.163 ; 26.485,31.874 ccw(c25.485,31.874) 26.485,31.874
  Layer 2 w0.5: 8.6,26.5 ccw(c7.5,26.5) 8.6,26.5 ; 8.6,29.04 ccw(c7.5,29.04) 8.6,29.04 ; 14.85,26.46 ccw(c13.75,26.46) 14.85,26.46 ; 14.85,29 ccw(c13.75,29) 14.85,29
  Bottom Layer w0.127: v1(23.947,38.154) 24.386,38.154 24.446,38.094
  Bottom Layer w0.4: v1@23.898,37.971 ccw(c22.898,37.971) v1@23.898,37.971 ; v1@23.898,44.067 ccw(c22.898,44.067) v1@23.898,44.067 ; 23.898,50.163 ccw(c22.898,50.163) 23.898,50.163 ; 23.945,31.874 ccw(c22.945,31.874) 23.945,31.874 ; 26.438,37.971 ccw(c25.438,37.971) 26.438,37.971 ; 26.438,44.067 ccw(c25.438,44.067) 26.438,44.067 ; 26.438,50.163 ccw(c25.438,50.163) 26.438,50.163 ; 26.485,31.874 ccw(c25.485,31.874) 26.485,31.874
  Bottom Layer w0.5: 8.6,26.5 ccw(c7.5,26.5) 8.6,26.5 ; 8.6,29.04 ccw(c7.5,29.04) 8.6,29.04 ; 14.85,26.46 ccw(c13.75,26.46) 14.85,26.46 ; 14.85,29 ccw(c13.75,29) 14.85,29